# Altium PCB PCB1.PcbDoc (part 2 of 2)
Units mm, origin at the board's own origin, x right, y up, seen from the top; angles counter-clockwise.
Board outline 300 x 52 mm, 2 copper layers (Top Layer, Bottom Layer); 9 components, 43 nets, 99 pads, 36 vias.
Unrouted connection lines stored in the file: 3.
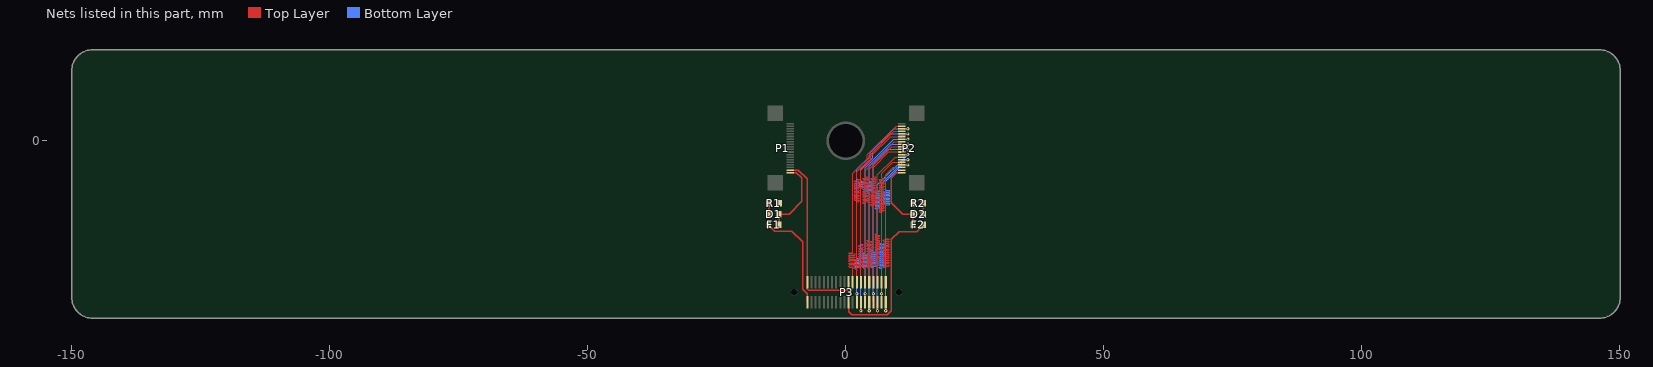
[diagram p2: the nets of this part, all layers, seen from the top]

## Via types
v1: diameter 0.6, hole 0.3, Top Layer to Bottom Layer, 36 vias

## Nets (pads, with @x,y where several pads share a name; then routed paths per layer and width w, separated by ;. In a path a pad name is that pad's centre, name@x,y a point inside that pad or via, vN(x,y) a via of type N, cw(c..) or ccw(c..) an arc to the next point about the centre after c; other vN are vias at no path point) (continued)
E11: P2.2 P3.24 | length 47.5
  Top Layer w0.127: P3.24@1.336,-27.435 1.336,-24.587 1.336,-24.562 1.235,-24.46 0.649,-24.46 0.548,-24.359 0.548,-24.308 0.649,-24.206 1.336,-24.206 1.696,-24.206 1.798,-24.105 1.798,-24.054 1.696,-23.952 1.336,-23.952 0.649,-23.952 0.548,-23.851 0.548,-23.8 0.649,-23.698 1.336,-23.698 1.696,-23.698 1.798,-23.597 1.798,-23.546 1.696,-23.444 1.336,-23.444 0.649,-23.444 0.548,-23.343 0.548,-23.292 0.649,-23.19 1.336,-23.19 1.696,-23.19 1.798,-23.089 1.798,-23.038 1.696,-22.936 1.336,-22.936 0.649,-22.936 0.548,-22.835 0.548,-22.784 0.649,-22.682 1.336,-22.682 1.696,-22.682 1.798,-22.581 1.798,-22.53 1.696,-22.428 1.336,-22.428 0.649,-22.428 0.548,-22.327 0.548,-22.276 0.649,-22.174 1.336,-22.174 1.696,-22.174 1.798,-22.073 1.798,-22.022 1.696,-21.92 1.336,-21.92 0.649,-21.92 0.548,-21.819 0.548,-21.768 0.649,-21.666 1.235,-21.666 1.336,-21.565 1.336,-18.745 1.336,-6.335 4.166,-3.505 4.166,-2.743 9.736,2.827 P2.2@10.846,2.827
E12: P2.3 P3.25 | length 46.8
  Top Layer w0.127: P3.25@2.136,-31.295 v1(2.136,-29.648) ; P2.3@10.846,2.327 v1(12.023,2.327)
  Bottom Layer w0.127: v1(2.136,-29.648) 2.136,-24.917 2.136,-24.892 2.035,-24.79 1.779,-24.79 1.678,-24.689 1.678,-24.638 1.779,-24.536 2.136,-24.536 2.493,-24.536 2.595,-24.435 2.595,-24.384 2.493,-24.282 2.136,-24.282 1.779,-24.282 1.678,-24.181 1.678,-24.13 1.779,-24.028 2.136,-24.028 2.493,-24.028 2.595,-23.927 2.595,-23.876 2.493,-23.774 2.136,-23.774 1.779,-23.774 1.678,-23.673 1.678,-23.622 1.779,-23.52 2.136,-23.52 2.493,-23.52 2.595,-23.419 2.595,-23.368 2.493,-23.266 2.136,-23.266 1.779,-23.266 1.678,-23.165 1.678,-23.114 1.779,-23.012 2.136,-23.012 2.493,-23.012 2.595,-22.911 2.595,-22.86 2.493,-22.758 2.238,-22.758 2.136,-22.657 2.136,-21.057 2.136,-5.56 4.721,-2.975 4.721,-2.193 9.241,2.327 v1(12.023,2.327)
E13: P2.4 P3.26 | length 47.5
  Top Layer w0.127: P3.26@2.136,-27.435 2.136,-12.852 2.136,-11.887 2.238,-11.786 2.501,-11.786 2.602,-11.684 2.602,-11.633 2.501,-11.532 2.136,-11.532 1.772,-11.532 1.67,-11.43 1.67,-11.379 1.772,-11.278 2.136,-11.278 2.501,-11.278 2.602,-11.176 2.602,-11.125 2.501,-11.024 2.136,-11.024 1.772,-11.024 1.67,-10.922 1.67,-10.871 1.772,-10.77 2.136,-10.77 2.501,-10.77 2.602,-10.668 2.602,-10.617 2.501,-10.516 2.136,-10.516 1.772,-10.516 1.67,-10.414 1.67,-10.363 1.772,-10.262 2.136,-10.262 2.501,-10.262 2.602,-10.16 2.602,-10.109 2.501,-10.008 2.136,-10.008 1.772,-10.008 1.67,-9.906 1.67,-9.855 1.772,-9.754 2.136,-9.754 2.501,-9.754 2.602,-9.652 2.602,-9.601 2.501,-9.5 2.136,-9.5 1.772,-9.5 1.67,-9.398 1.67,-9.347 1.772,-9.246 2.136,-9.246 2.501,-9.246 2.602,-9.144 2.602,-9.093 2.501,-8.992 2.136,-8.992 1.772,-8.992 1.67,-8.89 1.67,-8.839 1.772,-8.738 2.136,-8.738 2.501,-8.738 2.602,-8.636 2.602,-8.585 2.501,-8.484 2.136,-8.484 1.772,-8.484 1.67,-8.382 1.67,-8.331 1.772,-8.23 2.136,-8.23 2.501,-8.23 2.602,-8.128 2.602,-8.077 2.501,-7.976 2.136,-7.976 1.772,-7.976 1.67,-7.874 1.67,-7.823 1.772,-7.722 2.136,-7.722 2.501,-7.722 2.602,-7.62 2.602,-7.569 2.501,-7.468 2.238,-7.468 2.136,-7.366 2.136,-7.341 2.136,-6.012 4.496,-3.652 4.496,-2.946 9.27,1.827 P2.4@10.846,1.827
E14: P2.5 P3.27 | length 46.8
  Top Layer w0.127: v1(2.936,-32.942) P3.27@2.936,-31.295 ; P2.5@10.846,1.327 v1(12.023,1.327)
  Bottom Layer w0.127: v1(2.936,-32.942) 2.936,-11.125 2.936,-9.169 3.038,-9.068 3.305,-9.068 3.406,-8.966 3.406,-8.915 3.305,-8.814 2.936,-8.814 2.568,-8.814 2.466,-8.712 2.466,-8.661 2.568,-8.56 2.936,-8.56 3.305,-8.56 3.406,-8.458 3.406,-8.407 3.305,-8.306 2.936,-8.306 2.568,-8.306 2.466,-8.204 2.466,-8.153 2.568,-8.052 2.936,-8.052 3.305,-8.052 3.406,-7.95 3.406,-7.899 3.305,-7.798 3.038,-7.798 2.936,-7.696 2.936,-7.671 2.936,-5.547 5.182,-3.302 5.182,-2.195 8.704,1.327 v1(12.023,1.327)
E15: P2.6 P3.28 | length 47.5
  Top Layer w0.127: P3.28@2.936,-27.435 2.936,-24.714 2.936,-24.689 2.835,-24.587 2.566,-24.587 2.464,-24.486 2.464,-24.435 2.566,-24.333 2.936,-24.333 3.306,-24.333 3.408,-24.232 3.408,-24.181 3.306,-24.079 2.936,-24.079 2.566,-24.079 2.464,-23.978 2.464,-23.927 2.566,-23.825 2.936,-23.825 3.306,-23.825 3.408,-23.724 3.408,-23.673 3.306,-23.571 2.936,-23.571 2.566,-23.571 2.464,-23.47 2.464,-23.419 2.566,-23.317 2.936,-23.317 3.306,-23.317 3.408,-23.216 3.408,-23.165 3.306,-23.063 2.936,-23.063 2.566,-23.063 2.464,-22.962 2.464,-22.911 2.566,-22.809 2.936,-22.809 3.306,-22.809 3.408,-22.708 3.408,-22.657 3.306,-22.555 2.936,-22.555 2.566,-22.555 2.464,-22.454 2.464,-22.403 2.566,-22.301 2.936,-22.301 3.306,-22.301 3.408,-22.2 3.408,-22.149 3.306,-22.047 2.936,-22.047 2.566,-22.047 2.464,-21.946 2.464,-21.895 2.566,-21.793 2.936,-21.793 3.306,-21.793 3.408,-21.692 3.408,-21.641 3.306,-21.539 2.936,-21.539 2.566,-21.539 2.464,-21.438 2.464,-21.387 2.566,-21.285 2.936,-21.285 3.306,-21.285 3.408,-21.184 3.408,-21.133 3.306,-21.031 2.936,-21.031 2.566,-21.031 2.464,-20.93 2.464,-20.879 2.566,-20.777 2.936,-20.777 3.306,-20.777 3.408,-20.676 3.408,-20.625 3.306,-20.523 2.936,-20.523 2.566,-20.523 2.464,-20.422 2.464,-20.371 2.566,-20.269 2.936,-20.269 3.306,-20.269 3.408,-20.168 3.408,-20.117 3.306,-20.015 3.038,-20.015 2.936,-19.914 2.936,-17.805 2.936,-5.674 4.877,-3.734 4.877,-3.028 8.732,0.827 P2.6@10.846,0.827
E16: P2.7 P3.29 | length 46.8
  Top Layer w0.127: P3.29@3.736,-31.295 v1(3.736,-29.648) ; P2.7@10.846,0.327 v1(12.023,0.327)
  Bottom Layer w0.127: v1(3.736,-29.648) 3.736,-24.714 3.736,-24.689 3.635,-24.587 3.366,-24.587 3.264,-24.486 3.264,-24.435 3.366,-24.333 3.736,-24.333 4.107,-24.333 4.208,-24.232 4.208,-24.181 4.107,-24.079 3.736,-24.079 3.366,-24.079 3.264,-23.978 3.264,-23.927 3.366,-23.825 3.736,-23.825 4.107,-23.825 4.208,-23.724 4.208,-23.673 4.107,-23.571 3.736,-23.571 3.366,-23.571 3.264,-23.47 3.264,-23.419 3.366,-23.317 3.736,-23.317 4.107,-23.317 4.208,-23.216 4.208,-23.165 4.107,-23.063 3.736,-23.063 3.366,-23.063 3.264,-22.962 3.264,-22.911 3.366,-22.809 3.736,-22.809 4.107,-22.809 4.208,-22.708 4.208,-22.657 4.107,-22.555 3.736,-22.555 3.366,-22.555 3.264,-22.454 3.264,-22.403 3.366,-22.301 3.736,-22.301 4.107,-22.301 4.208,-22.2 4.208,-22.149 4.107,-22.047 3.736,-22.047 3.366,-22.047 3.264,-21.946 3.264,-21.895 3.366,-21.793 3.635,-21.793 3.736,-21.692 3.736,-20.93 3.736,-5.23 9.294,0.327 v1(12.023,0.327)
E17: P2.8 P3.30 | length 47.5
  Top Layer w0.127: P3.30@3.736,-27.435 3.736,-12.776 3.736,-12.167 3.635,-12.065 3.365,-12.065 3.263,-11.963 3.263,-11.913 3.365,-11.811 3.736,-11.811 4.108,-11.811 4.209,-11.709 4.209,-11.659 4.108,-11.557 3.736,-11.557 3.365,-11.557 3.263,-11.455 3.263,-11.405 3.365,-11.303 3.736,-11.303 4.108,-11.303 4.209,-11.201 4.209,-11.151 4.108,-11.049 3.736,-11.049 3.365,-11.049 3.263,-10.947 3.263,-10.897 3.365,-10.795 3.736,-10.795 4.108,-10.795 4.209,-10.693 4.209,-10.643 4.108,-10.541 3.736,-10.541 3.365,-10.541 3.263,-10.439 3.263,-10.389 3.365,-10.287 3.736,-10.287 4.108,-10.287 4.209,-10.185 4.209,-10.135 4.108,-10.033 3.736,-10.033 3.365,-10.033 3.263,-9.931 3.263,-9.881 3.365,-9.779 3.736,-9.779 4.108,-9.779 4.209,-9.677 4.209,-9.627 4.108,-9.525 3.736,-9.525 3.365,-9.525 3.263,-9.423 3.263,-9.373 3.365,-9.271 3.736,-9.271 4.108,-9.271 4.209,-9.169 4.209,-9.119 4.108,-9.017 3.736,-9.017 3.365,-9.017 3.263,-8.915 3.263,-8.865 3.365,-8.763 3.736,-8.763 4.108,-8.763 4.209,-8.661 4.209,-8.611 4.108,-8.509 3.736,-8.509 3.365,-8.509 3.263,-8.407 3.263,-8.357 3.365,-8.255 3.736,-8.255 4.108,-8.255 4.209,-8.153 4.209,-8.103 4.108,-8.001 3.736,-8.001 3.365,-8.001 3.263,-7.899 3.263,-7.849 3.365,-7.747 3.736,-7.747 4.108,-7.747 4.209,-7.645 4.209,-7.595 4.108,-7.493 3.736,-7.493 3.365,-7.493 3.263,-7.391 3.263,-7.341 3.365,-7.239 3.736,-7.239 4.108,-7.239 4.209,-7.137 4.209,-7.087 4.108,-6.985 3.838,-6.985 3.736,-6.883 3.736,-6.858 3.736,-5.84 9.403,-0.173 P2.8@10.846,-0.173
E18: P2.9 P3.31 | length 46.6
  Top Layer w0.127: v1(4.536,-32.942) P3.31@4.536,-31.295 ; P2.9@10.846,-0.673 v1(12.023,-0.673)
  Bottom Layer w0.127: v1(4.536,-32.942) 4.536,-11.303 4.536,-9.957 4.435,-9.855 4.165,-9.855 4.063,-9.754 4.063,-9.703 4.165,-9.601 4.536,-9.601 4.908,-9.601 5.009,-9.5 5.009,-9.449 4.908,-9.347 4.536,-9.347 4.165,-9.347 4.063,-9.246 4.063,-9.195 4.165,-9.093 4.536,-9.093 4.908,-9.093 5.009,-8.992 5.009,-8.941 4.908,-8.839 4.536,-8.839 4.165,-8.839 4.063,-8.738 4.063,-8.687 4.165,-8.585 4.536,-8.585 4.908,-8.585 5.009,-8.484 5.009,-8.433 4.908,-8.331 4.536,-8.331 4.165,-8.331 4.063,-8.23 4.063,-8.179 4.165,-8.077 4.536,-8.077 4.908,-8.077 5.009,-7.976 5.009,-7.925 4.908,-7.823 4.638,-7.823 4.536,-7.722 4.536,-7.696 4.536,-4.892 8.756,-0.673 v1(12.023,-0.673)
E19: P2.10 P3.32 | length 47.3
  Top Layer w0.127: P3.32@4.536,-27.435 4.536,-24.714 4.536,-24.689 4.435,-24.587 4.165,-24.587 4.063,-24.486 4.063,-24.435 4.165,-24.333 4.536,-24.333 4.908,-24.333 5.009,-24.232 5.009,-24.181 4.908,-24.079 4.536,-24.079 4.165,-24.079 4.063,-23.978 4.063,-23.927 4.165,-23.825 4.536,-23.825 4.908,-23.825 5.009,-23.724 5.009,-23.673 4.908,-23.571 4.536,-23.571 4.165,-23.571 4.063,-23.47 4.063,-23.419 4.165,-23.317 4.536,-23.317 4.908,-23.317 5.009,-23.216 5.009,-23.165 4.908,-23.063 4.536,-23.063 4.165,-23.063 4.063,-22.962 4.063,-22.911 4.165,-22.809 4.536,-22.809 4.908,-22.809 5.009,-22.708 5.009,-22.657 4.908,-22.555 4.536,-22.555 4.165,-22.555 4.063,-22.454 4.063,-22.403 4.165,-22.301 4.536,-22.301 4.908,-22.301 5.009,-22.2 5.009,-22.149 4.908,-22.047 4.536,-22.047 4.165,-22.047 4.063,-21.946 4.063,-21.895 4.165,-21.793 4.536,-21.793 4.908,-21.793 5.009,-21.692 5.009,-21.641 4.908,-21.539 4.536,-21.539 4.165,-21.539 4.063,-21.438 4.063,-21.387 4.165,-21.285 4.536,-21.285 4.908,-21.285 5.009,-21.184 5.009,-21.133 4.908,-21.031 4.536,-21.031 4.165,-21.031 4.063,-20.93 4.063,-20.879 4.165,-20.777 4.536,-20.777 4.908,-20.777 5.009,-20.676 5.009,-20.625 4.908,-20.523 4.536,-20.523 4.165,-20.523 4.063,-20.422 4.063,-20.371 4.165,-20.269 4.536,-20.269 4.908,-20.269 5.009,-20.168 5.009,-20.117 4.908,-20.015 4.536,-20.015 4.165,-20.015 4.063,-19.914 4.063,-19.863 4.165,-19.761 4.536,-19.761 4.908,-19.761 5.009,-19.66 5.009,-19.609 4.908,-19.507 4.536,-19.507 4.165,-19.507 4.063,-19.406 4.063,-19.355 4.165,-19.253 4.435,-19.253 4.536,-19.152 4.536,-17.399 4.536,-5.502 8.866,-1.173 P2.10@10.846,-1.173
E20: P2.11 P3.33 | length 46.4
  Top Layer w0.127: P3.33@5.336,-31.295 v1(5.336,-29.648) ; P2.11@10.846,-1.673 v1(12.023,-1.673)
  Bottom Layer w0.127: v1(5.336,-29.648) 5.336,-24.663 5.336,-24.638 5.235,-24.536 4.965,-24.536 4.863,-24.435 4.863,-24.384 4.965,-24.282 5.336,-24.282 5.708,-24.282 5.809,-24.181 5.809,-24.13 5.708,-24.028 5.336,-24.028 4.965,-24.028 4.863,-23.927 4.863,-23.876 4.965,-23.774 5.336,-23.774 5.708,-23.774 5.809,-23.673 5.809,-23.622 5.708,-23.52 5.336,-23.52 4.965,-23.52 4.863,-23.419 4.863,-23.368 4.965,-23.266 5.336,-23.266 5.708,-23.266 5.809,-23.165 5.809,-23.114 5.708,-23.012 5.336,-23.012 4.965,-23.012 4.863,-22.911 4.863,-22.86 4.965,-22.758 5.336,-22.758 5.708,-22.758 5.809,-22.657 5.809,-22.606 5.708,-22.504 5.336,-22.504 4.965,-22.504 4.863,-22.403 4.863,-22.352 4.965,-22.25 5.336,-22.25 5.708,-22.25 5.809,-22.149 5.809,-22.098 5.708,-21.996 5.336,-21.996 4.965,-21.996 4.863,-21.895 4.863,-21.844 4.965,-21.742 5.336,-21.742 5.708,-21.742 5.809,-21.641 5.809,-21.59 5.708,-21.488 5.336,-21.488 4.965,-21.488 4.863,-21.387 4.863,-21.336 4.965,-21.234 5.235,-21.234 5.336,-21.133 5.336,-19.736 5.336,-4.57 8.233,-1.673 v1(12.023,-1.673)
E21: P2.12 P3.34 | length 47.1
  Top Layer w0.127: P3.34@5.336,-27.435 5.336,-13.081 5.336,-12.649 5.235,-12.548 4.965,-12.548 4.863,-12.446 4.863,-12.395 4.965,-12.294 5.336,-12.294 5.708,-12.294 5.809,-12.192 5.809,-12.141 5.708,-12.04 5.336,-12.04 4.965,-12.04 4.863,-11.938 4.863,-11.887 4.965,-11.786 5.336,-11.786 5.708,-11.786 5.809,-11.684 5.809,-11.633 5.708,-11.532 5.336,-11.532 4.965,-11.532 4.863,-11.43 4.863,-11.379 4.965,-11.278 5.336,-11.278 5.708,-11.278 5.809,-11.176 5.809,-11.125 5.708,-11.024 5.336,-11.024 4.965,-11.024 4.863,-10.922 4.863,-10.871 4.965,-10.77 5.336,-10.77 5.708,-10.77 5.809,-10.668 5.809,-10.617 5.708,-10.516 5.336,-10.516 4.965,-10.516 4.863,-10.414 4.863,-10.363 4.965,-10.262 5.336,-10.262 5.708,-10.262 5.809,-10.16 5.809,-10.109 5.708,-10.008 5.336,-10.008 4.965,-10.008 4.863,-9.906 4.863,-9.855 4.965,-9.754 5.336,-9.754 5.708,-9.754 5.809,-9.652 5.809,-9.601 5.708,-9.5 5.336,-9.5 4.965,-9.5 4.863,-9.398 4.863,-9.347 4.965,-9.246 5.336,-9.246 5.708,-9.246 5.809,-9.144 5.809,-9.093 5.708,-8.992 5.336,-8.992 4.965,-8.992 4.863,-8.89 4.863,-8.839 4.965,-8.738 5.336,-8.738 5.708,-8.738 5.809,-8.636 5.809,-8.585 5.708,-8.484 5.336,-8.484 4.965,-8.484 4.863,-8.382 4.863,-8.331 4.965,-8.23 5.336,-8.23 5.708,-8.23 5.809,-8.128 5.809,-8.077 5.708,-7.976 5.336,-7.976 4.965,-7.976 4.863,-7.874 4.863,-7.823 4.965,-7.722 5.336,-7.722 5.708,-7.722 5.809,-7.62 5.809,-7.569 5.708,-7.468 5.336,-7.468 4.965,-7.468 4.863,-7.366 4.863,-7.315 4.965,-7.214 5.336,-7.214 5.708,-7.214 5.809,-7.112 5.809,-7.061 5.708,-6.96 5.438,-6.96 5.336,-6.858 5.336,-6.833 5.336,-5.179 8.343,-2.173 P2.12@10.846,-2.173
E22: P2.13 P3.35 | length 46.8
  Top Layer w0.127: v1(6.136,-32.942) P3.35@6.136,-31.295 ; P2.13@10.846,-2.673 v1(12.023,-2.673)
  Bottom Layer w0.127: v1(6.136,-32.942) 6.136,-14.63 6.136,-13.31 6.035,-13.208 5.772,-13.208 5.67,-13.106 5.67,-13.056 5.772,-12.954 6.136,-12.954 6.5,-12.954 6.602,-12.852 6.602,-12.802 6.5,-12.7 6.136,-12.7 5.772,-12.7 5.67,-12.598 5.67,-12.548 5.772,-12.446 6.136,-12.446 6.5,-12.446 6.602,-12.344 6.602,-12.294 6.5,-12.192 6.136,-12.192 5.772,-12.192 5.67,-12.09 5.67,-12.04 5.772,-11.938 6.136,-11.938 6.5,-11.938 6.602,-11.836 6.602,-11.786 6.5,-11.684 6.136,-11.684 5.772,-11.684 5.67,-11.582 5.67,-11.532 5.772,-11.43 6.136,-11.43 6.5,-11.43 6.602,-11.328 6.602,-11.278 6.5,-11.176 6.136,-11.176 5.772,-11.176 5.67,-11.074 5.67,-11.024 5.772,-10.922 6.136,-10.922 6.5,-10.922 6.602,-10.82 6.602,-10.77 6.5,-10.668 6.136,-10.668 5.772,-10.668 5.67,-10.566 5.67,-10.516 5.772,-10.414 6.136,-10.414 6.5,-10.414 6.602,-10.312 6.602,-10.262 6.5,-10.16 6.136,-10.16 5.772,-10.16 5.67,-10.058 5.67,-10.008 5.772,-9.906 6.136,-9.906 6.5,-9.906 6.602,-9.804 6.602,-9.754 6.5,-9.652 6.238,-9.652 6.136,-9.55 6.136,-9.525 6.136,-8.559 v1(12.023,-2.673)
E23: P2.14 P3.36 | length 47.5
  Top Layer w0.127: P3.36@6.136,-27.435 6.136,-24.486 6.136,-24.46 6.035,-24.359 5.765,-24.359 5.664,-24.257 5.664,-24.206 5.765,-24.105 6.136,-24.105 6.507,-24.105 6.609,-24.003 6.609,-23.952 6.507,-23.851 6.136,-23.851 5.765,-23.851 5.664,-23.749 5.664,-23.698 5.765,-23.597 6.136,-23.597 6.507,-23.597 6.609,-23.495 6.609,-23.444 6.507,-23.343 6.136,-23.343 5.765,-23.343 5.664,-23.241 5.664,-23.19 5.765,-23.089 6.136,-23.089 6.507,-23.089 6.609,-22.987 6.609,-22.936 6.507,-22.835 6.136,-22.835 5.765,-22.835 5.664,-22.733 5.664,-22.682 5.765,-22.581 6.136,-22.581 6.507,-22.581 6.609,-22.479 6.609,-22.428 6.507,-22.327 6.136,-22.327 5.765,-22.327 5.664,-22.225 5.664,-22.174 5.765,-22.073 6.136,-22.073 6.507,-22.073 6.609,-21.971 6.609,-21.92 6.507,-21.819 6.136,-21.819 5.765,-21.819 5.664,-21.717 5.664,-21.666 5.765,-21.565 6.136,-21.565 6.507,-21.565 6.609,-21.463 6.609,-21.412 6.507,-21.311 6.136,-21.311 5.765,-21.311 5.664,-21.209 5.664,-21.158 5.765,-21.057 6.136,-21.057 6.507,-21.057 6.609,-20.955 6.609,-20.904 6.507,-20.803 6.136,-20.803 5.765,-20.803 5.664,-20.701 5.664,-20.65 5.765,-20.549 6.136,-20.549 6.507,-20.549 6.609,-20.447 6.609,-20.396 6.507,-20.295 6.136,-20.295 5.765,-20.295 5.664,-20.193 5.664,-20.142 5.765,-20.041 6.136,-20.041 6.507,-20.041 6.609,-19.939 6.609,-19.888 6.507,-19.787 6.136,-19.787 5.765,-19.787 5.664,-19.685 5.664,-19.634 5.765,-19.533 6.136,-19.533 6.507,-19.533 6.609,-19.431 6.609,-19.38 6.507,-19.279 6.136,-19.279 5.765,-19.279 5.664,-19.177 5.664,-19.126 5.765,-19.025 6.136,-19.025 6.507,-19.025 6.609,-18.923 6.609,-18.872 6.507,-18.771 6.136,-18.771 5.765,-18.771 5.664,-18.669 5.664,-18.618 5.765,-18.517 6.136,-18.517 6.507,-18.517 6.609,-18.415 6.609,-18.364 6.507,-18.263 6.136,-18.263 5.765,-18.263 5.664,-18.161 5.664,-18.11 5.765,-18.009 6.035,-18.009 6.136,-17.907 6.136,-17.094 6.136,-6.584 9.548,-3.173 P2.14@10.846,-3.173
E24: P2.15 P3.37 | length 46.8
  Top Layer w0.127: P3.37@6.936,-31.295 v1(6.936,-29.648) ; P2.15@10.846,-3.673 v1(12.023,-3.673)
  Bottom Layer w0.127: v1(6.936,-29.648) 6.936,-24.79 6.936,-24.765 6.835,-24.663 6.565,-24.663 6.464,-24.562 6.464,-24.511 6.565,-24.409 6.936,-24.409 7.307,-24.409 7.409,-24.308 7.409,-24.257 7.307,-24.155 6.936,-24.155 6.565,-24.155 6.464,-24.054 6.464,-24.003 6.565,-23.901 6.936,-23.901 7.307,-23.901 7.409,-23.8 7.409,-23.749 7.307,-23.647 6.936,-23.647 6.565,-23.647 6.464,-23.546 6.464,-23.495 6.565,-23.393 6.936,-23.393 7.307,-23.393 7.409,-23.292 7.409,-23.241 7.307,-23.139 6.936,-23.139 6.565,-23.139 6.464,-23.038 6.464,-22.987 6.565,-22.885 6.936,-22.885 7.307,-22.885 7.409,-22.784 7.409,-22.733 7.307,-22.631 6.936,-22.631 6.565,-22.631 6.464,-22.53 6.464,-22.479 6.565,-22.377 6.936,-22.377 7.307,-22.377 7.409,-22.276 7.409,-22.225 7.307,-22.123 6.936,-22.123 6.565,-22.123 6.464,-22.022 6.464,-21.971 6.565,-21.869 6.936,-21.869 7.307,-21.869 7.409,-21.768 7.409,-21.717 7.307,-21.615 6.936,-21.615 6.565,-21.615 6.464,-21.514 6.464,-21.463 6.565,-21.361 6.936,-21.361 7.307,-21.361 7.409,-21.26 7.409,-21.209 7.307,-21.107 6.936,-21.107 6.565,-21.107 6.464,-21.006 6.464,-20.955 6.565,-20.853 6.936,-20.853 7.307,-20.853 7.409,-20.752 7.409,-20.701 7.307,-20.599 6.936,-20.599 6.565,-20.599 6.464,-20.498 6.464,-20.447 6.565,-20.345 6.936,-20.345 7.307,-20.345 7.409,-20.244 7.409,-20.193 7.307,-20.091 6.936,-20.091 6.565,-20.091 6.464,-19.99 6.464,-19.939 6.565,-19.837 6.835,-19.837 6.936,-19.736 6.936,-17.78 6.936,-8.222 11.485,-3.673 v1(12.023,-3.673)
E25: P2.16 P3.38 | length 47.3
  Top Layer w0.127: P3.38@6.936,-27.435 6.936,-14.3 6.936,-13.945 6.835,-13.843 6.565,-13.843 6.463,-13.741 6.463,-13.691 6.565,-13.589 6.936,-13.589 7.308,-13.589 7.409,-13.487 7.409,-13.437 7.308,-13.335 6.936,-13.335 6.565,-13.335 6.463,-13.233 6.463,-13.183 6.565,-13.081 6.936,-13.081 7.308,-13.081 7.409,-12.979 7.409,-12.929 7.308,-12.827 6.936,-12.827 6.565,-12.827 6.463,-12.725 6.463,-12.675 6.565,-12.573 6.936,-12.573 7.308,-12.573 7.409,-12.471 7.409,-12.421 7.308,-12.319 6.936,-12.319 6.565,-12.319 6.463,-12.217 6.463,-12.167 6.565,-12.065 6.936,-12.065 7.308,-12.065 7.409,-11.963 7.409,-11.913 7.308,-11.811 6.936,-11.811 6.565,-11.811 6.463,-11.709 6.463,-11.659 6.565,-11.557 6.936,-11.557 7.308,-11.557 7.409,-11.455 7.409,-11.405 7.308,-11.303 6.936,-11.303 6.565,-11.303 6.463,-11.201 6.463,-11.151 6.565,-11.049 6.936,-11.049 7.308,-11.049 7.409,-10.947 7.409,-10.897 7.308,-10.795 6.936,-10.795 6.565,-10.795 6.463,-10.693 6.463,-10.643 6.565,-10.541 6.936,-10.541 7.308,-10.541 7.409,-10.439 7.409,-10.389 7.308,-10.287 6.936,-10.287 6.565,-10.287 6.463,-10.185 6.463,-10.135 6.565,-10.033 6.936,-10.033 7.308,-10.033 7.409,-9.931 7.409,-9.881 7.308,-9.779 6.936,-9.779 6.565,-9.779 6.463,-9.677 6.463,-9.627 6.565,-9.525 6.936,-9.525 7.308,-9.525 7.409,-9.423 7.409,-9.373 7.308,-9.271 6.936,-9.271 6.565,-9.271 6.463,-9.169 6.463,-9.119 6.565,-9.017 6.936,-9.017 7.308,-9.017 7.409,-8.915 7.409,-8.865 7.308,-8.763 6.936,-8.763 6.565,-8.763 6.463,-8.661 6.463,-8.611 6.565,-8.509 6.936,-8.509 7.308,-8.509 7.409,-8.407 7.409,-8.357 7.308,-8.255 6.936,-8.255 6.565,-8.255 6.463,-8.153 6.463,-8.103 6.565,-8.001 6.936,-8.001 7.308,-8.001 7.409,-7.899 7.409,-7.849 7.308,-7.747 6.936,-7.747 6.565,-7.747 6.463,-7.645 6.463,-7.595 6.565,-7.493 6.936,-7.493 7.308,-7.493 7.409,-7.391 7.409,-7.341 7.308,-7.239 7.038,-7.239 6.936,-7.137 6.936,-7.112 6.936,-6.297 9.061,-4.173 P2.16@10.846,-4.173
E26: P2.17 P3.39 | length 46.4
  Top Layer w0.127: v1(7.736,-32.942) P3.39@7.736,-31.295 ; P2.17@10.846,-4.673 v1(12.023,-4.673)
  Bottom Layer w0.127: v1(7.736,-32.942) 7.736,-14.275 7.736,-12.471 7.838,-12.37 8.435,-12.37 8.536,-12.268 8.536,-12.217 8.435,-12.116 7.736,-12.116 7.365,-12.116 7.263,-12.014 7.263,-11.963 7.365,-11.862 7.736,-11.862 8.435,-11.862 8.536,-11.76 8.536,-11.709 8.435,-11.608 7.736,-11.608 7.365,-11.608 7.263,-11.506 7.263,-11.455 7.365,-11.354 7.736,-11.354 8.435,-11.354 8.536,-11.252 8.536,-11.201 8.435,-11.1 7.736,-11.1 7.365,-11.1 7.263,-10.998 7.263,-10.947 7.365,-10.846 7.736,-10.846 8.435,-10.846 8.536,-10.744 8.536,-10.693 8.435,-10.592 7.736,-10.592 7.365,-10.592 7.263,-10.49 7.263,-10.439 7.365,-10.338 7.736,-10.338 8.435,-10.338 8.536,-10.236 8.536,-10.185 8.435,-10.084 7.736,-10.084 7.365,-10.084 7.263,-9.982 7.263,-9.931 7.365,-9.83 7.736,-9.83 8.435,-9.83 8.536,-9.728 8.536,-9.677 8.435,-9.576 7.838,-9.576 7.736,-9.474 7.736,-9.449 7.736,-7.884 10.948,-4.673 v1(12.023,-4.673)
E27: P2.18 P3.40 | length 47.5
  Top Layer w0.127: P3.40@7.736,-27.435 7.736,-24.663 7.736,-24.638 7.635,-24.536 7.373,-24.536 7.272,-24.435 7.272,-24.384 7.373,-24.282 7.736,-24.282 8.339,-24.282 8.44,-24.181 8.44,-24.13 8.339,-24.028 7.736,-24.028 7.373,-24.028 7.272,-23.927 7.272,-23.876 7.373,-23.774 7.736,-23.774 8.339,-23.774 8.44,-23.673 8.44,-23.622 8.339,-23.52 7.736,-23.52 7.373,-23.52 7.272,-23.419 7.272,-23.368 7.373,-23.266 7.736,-23.266 8.339,-23.266 8.44,-23.165 8.44,-23.114 8.339,-23.012 7.736,-23.012 7.373,-23.012 7.272,-22.911 7.272,-22.86 7.373,-22.758 7.736,-22.758 8.339,-22.758 8.44,-22.657 8.44,-22.606 8.339,-22.504 7.736,-22.504 7.373,-22.504 7.272,-22.403 7.272,-22.352 7.373,-22.25 7.736,-22.25 8.339,-22.25 8.44,-22.149 8.44,-22.098 8.339,-21.996 7.736,-21.996 7.373,-21.996 7.272,-21.895 7.272,-21.844 7.373,-21.742 7.736,-21.742 8.339,-21.742 8.44,-21.641 8.44,-21.59 8.339,-21.488 7.736,-21.488 7.373,-21.488 7.272,-21.387 7.272,-21.336 7.373,-21.234 7.736,-21.234 8.339,-21.234 8.44,-21.133 8.44,-21.082 8.339,-20.98 7.736,-20.98 7.373,-20.98 7.272,-20.879 7.272,-20.828 7.373,-20.726 7.736,-20.726 8.339,-20.726 8.44,-20.625 8.44,-20.574 8.339,-20.472 7.736,-20.472 7.373,-20.472 7.272,-20.371 7.272,-20.32 7.373,-20.218 7.736,-20.218 8.339,-20.218 8.44,-20.117 8.44,-20.066 8.339,-19.964 7.736,-19.964 7.373,-19.964 7.272,-19.863 7.272,-19.812 7.373,-19.71 7.736,-19.71 8.339,-19.71 8.44,-19.609 8.44,-19.558 8.339,-19.456 7.736,-19.456 7.373,-19.456 7.272,-19.355 7.272,-19.304 7.373,-19.202 7.736,-19.202 8.339,-19.202 8.441,-19.101 8.441,-19.05 8.339,-18.948 7.838,-18.948 7.736,-18.847 7.736,-18.39 7.736,-6.615 9.178,-5.173 P2.18@10.846,-5.173
GND: P1.2 P2.19 P3.2 P3.22 R1.2 R2.1 | length 34.9
  Top Layer w0.254: P1.2@-10.77,-5.672 -9.174,-5.672 -7.464,-7.383 P3.2@-7.464,-27.435 -7.464,-28.731 -7.213,-28.982 0.304,-28.982 0.536,-28.75 P3.22@0.536,-27.435
NetD1_1: D1.1 F1.2 P1.1 | length 14.7
  Top Layer w0.254: F1.2@-12.954,-16.307 -12.929,-16.281 D1.1@-12.929,-14.199 -10.998,-14.199 -8.56,-11.76 -8.56,-7.188 -9.576,-6.172 P1.1@-10.77,-6.172
NetD1_2: D1.2 R1.1 | length 2.1
  Top Layer w0.254: D1.2@-14.961,-14.199 -14.935,-14.173 R1.1@-14.935,-12.09
NetD2_1: D2.1 F2.2 P2.20 | length 14.5
  Top Layer w0.254: P2.20@10.846,-6.173 9.753,-6.173 8.763,-7.163 8.763,-11.963 11.024,-14.224 D2.1@12.979,-14.224 12.979,-16.281 F2.2@13.005,-16.307
NetD2_2: D2.2 R2.2 | length 2.1
  Top Layer w0.254: D2.2@15.011,-14.224 R2.2@15.011,-12.141
VCC1: F1.1 P3.1 | length 20.1
  Top Layer w0.254: F1.1@-14.986,-16.307 -13.792,-17.501 -10.465,-17.501 -8.357,-19.609 -8.357,-28.727 -7.464,-29.62 P3.1@-7.464,-31.295
VCC2: F2.1 P3.21 | length 31.9
  Top Layer w0.254: P3.21@0.536,-31.295 0.536,-33.124 1.143,-33.731 8.026,-33.731 8.839,-32.918 8.839,-19.126 10.363,-17.602 13.741,-17.602 F2.1@15.037,-16.307
pads on no net: P1.21 P1.22 P2.21 P2.22 P3.41 P3.42

## Keep-outs
Keep-Out Layer:
  lines w0.254: -149.965,-29.382 -149.965,-28.382 -149.965,-30.382 ccw(c-145.965,-30.382) -145.965,-34.382 146.035,-34.382 ccw(c145.785,-30.132) 150.035,-29.882 ; 150.035,-30.382 150.035,-29.382 ; 150.035,-29.382 150.035,-28.382 150.035,-29.382

## Other copper
Top Layer:
  text "13" at -131.965,11.618 h1
  text "12" at -121.965,11.618 h1
  text "11" at -111.465,11.618 h1
  text "10" at -101.965,11.618 h1
  text "9" at -90.965,11.618 h1
  text "8" at -80.965,11.618 h1
  text "7" at -70.965,11.618 h1
  text "6" at -60.965,11.618 h1
  text "5" at -50.965,11.618 h1
  text "4" at -40.965,11.618 h1
  text "3" at -30.965,11.618 h1
  text "2" at -20.965,11.618 h1
  text "1" at -10.965,11.618 h1
  text "1" at 10.535,11.618 h1
  text "2" at 20.535,11.618 h1
  text "3" at 30.535,11.618 h1
  text "4" at 40.535,11.618 h1
  text "5" at 50.535,11.618 h1
  text "6" at 60.535,11.618 h1
  text "7" at 70.535,11.618 h1
  text "8" at 80.535,11.618 h1
  text "9" at 90.535,11.618 h1
  text "10" at 100.535,11.618 h1
  text "11" at 110.535,11.618 h1
  text "12" at 120.535,11.618 h1
  text "13" at 130.535,11.618 h1
  text "0" at 0.535,10.118 h1

## Silkscreen, mask and mechanical layers (free items; w line width, h text height)
Top Overlay:
  drawing of 295 lines, arcs and shapes, not listed
  text "1" at 9.957,4.216 h0.8
  text "20" at -10.135,4.14 h0.8
  text "JLCJLCJLCJLC" at -13.335,-6.121 h0.8 r90
  text "20" at 8.966,-7.925 h0.8
  text "1" at -10.033,-7.95 h0.8
  text "40" at 7.036,-25.349 h0.8
  text "2" at -7.722,-25.375 h0.8
  text "OV5640 Stereo Camera" at -138.465,-25.882 h1
  text "Designed by LiuYang" at -138.465,-28.382 h1
  text "github.com/liuyang9609" at -138.465,-30.882 h1
  text "1" at -7.595,-33.934 h0.8
  text "39" at 7.112,-34.061 h0.8
Mechanical 1:
  lines w0.254: -138.465,-21.963 cw(c-138.465,-20.382) -138.465,-18.801 ; -138.465,-21.882 -11.465,-21.882 ccw(c-11.465,-20.382) -11.465,-18.882 -138.465,-18.882 ; -138.465,8.037 cw(c-138.465,9.618) -138.465,11.199 ; -138.465,8.118 -11.265,8.118 ; -138.465,11.118 -11.165,11.118 ; -11.465,8.118 ccw(c-11.465,9.618) -11.465,11.118 ; 11.135,-18.882 139.035,-18.882 ; 11.435,-21.882 139.035,-21.882 ; 11.535,-21.782 cw(c11.535,-20.282) 11.535,-18.782 ; 139.031,8.039 ccw(c139.116,9.618) 139.116,11.199 ; 139.035,-21.963 ccw(c139.035,-20.382) 139.035,-18.801 ; 139.035,8.118 11.535,8.118 cw(c11.535,9.618) 11.535,11.118 139.035,11.118 ; -149.965,-30.382 ccw(c-145.965,-30.382) -145.965,-34.382 146.035,-34.382 ccw(c146.035,-30.382) 150.035,-30.382 150.035,-29.382 150.035,-28.382 150.035,13.618 ccw(c146.035,13.618) 146.035,17.618 -145.965,17.618 ccw(c-145.965,13.618) -149.965,13.618 -149.965,-28.382 -149.965,-29.382 -149.965,-30.382